# Altium PCB BOOST - 副本.PcbDoc
Units mm, origin at the board's own origin, x right, y up, seen from the top; angles counter-clockwise.
Board outline 27 x 35.5 mm, 2 copper layers (Top Layer, Bottom Layer); 22 components, 9 nets, 62 pads, 16 vias.
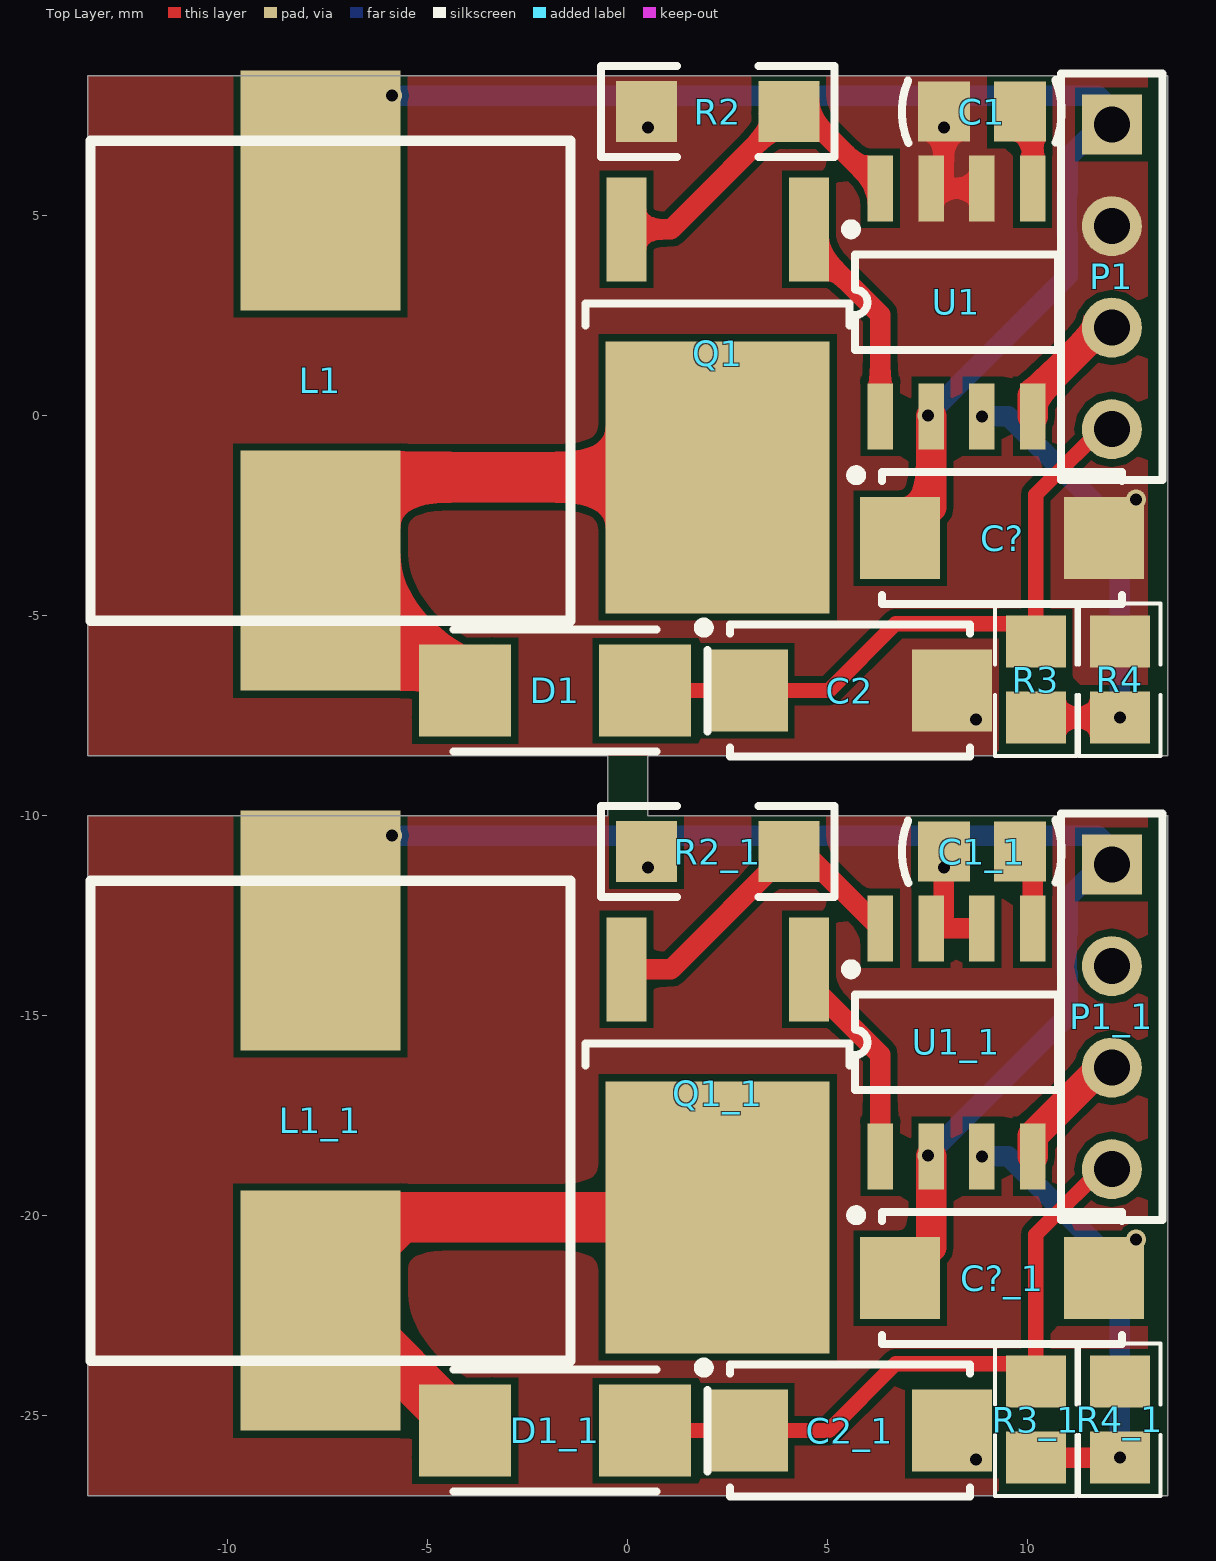
[diagram p0: Top Layer view]
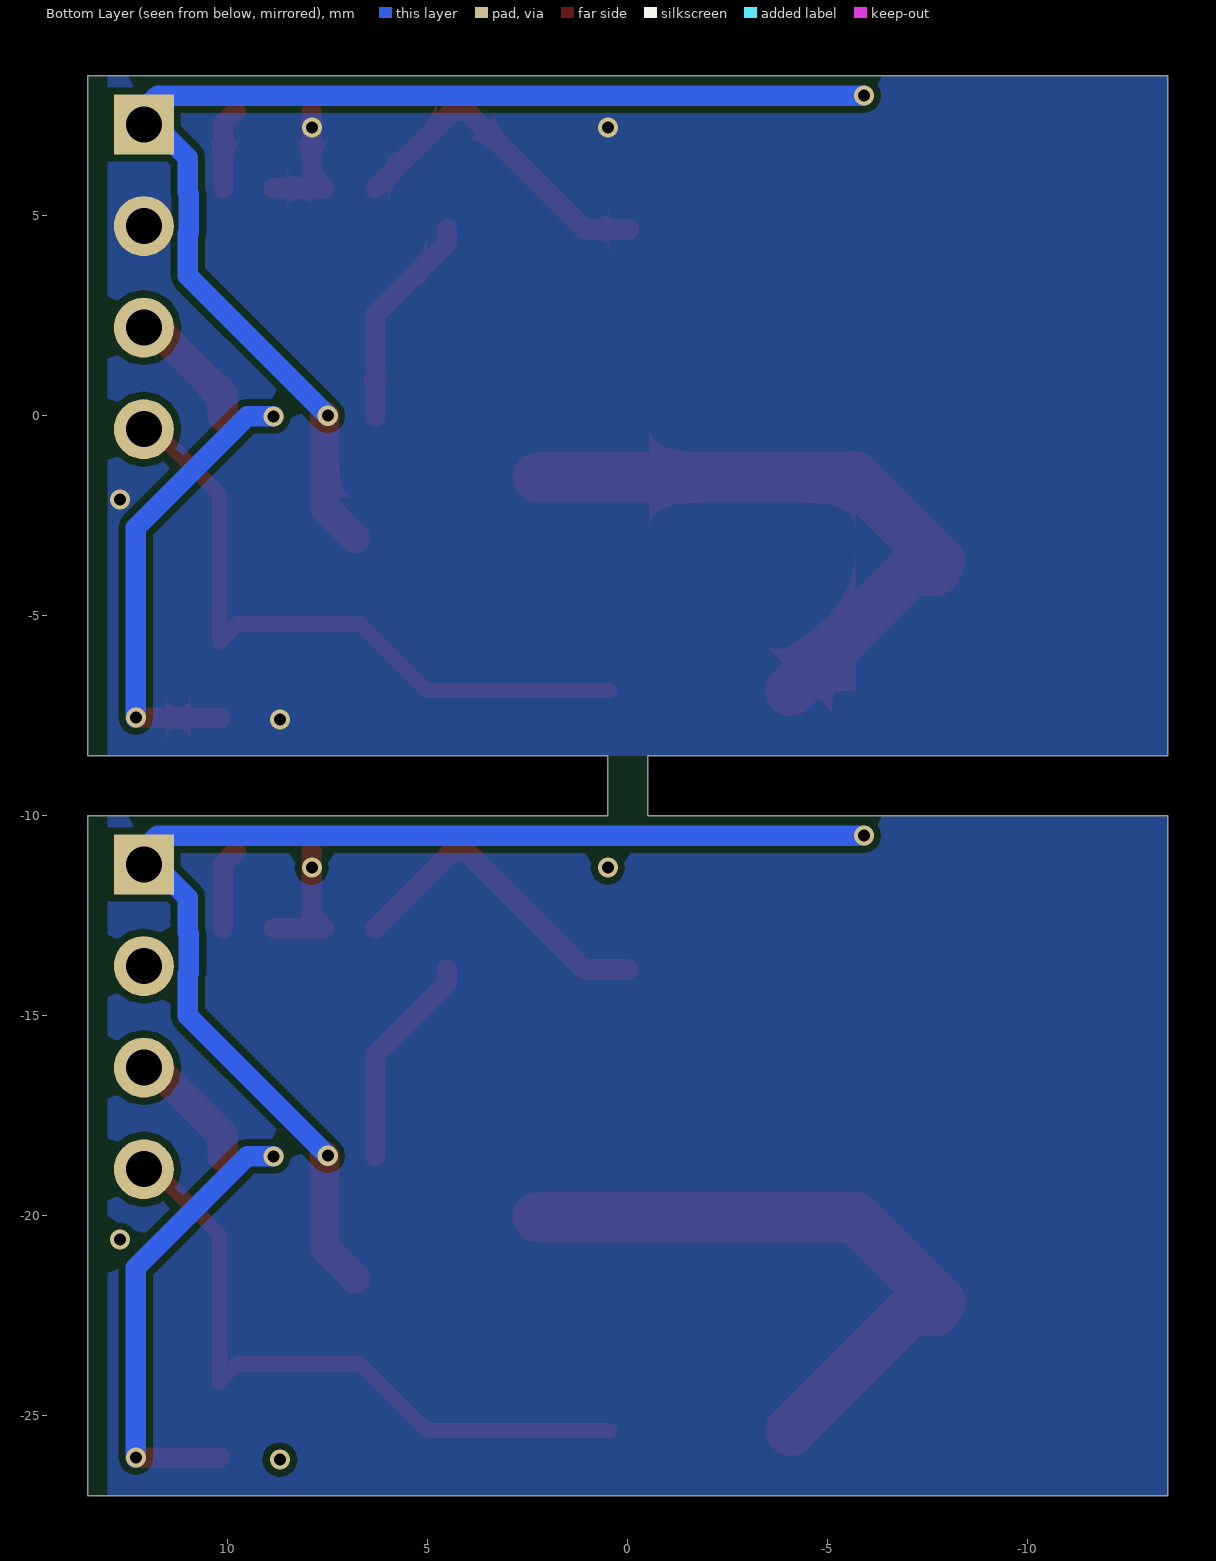
[diagram p1: Bottom Layer view, seen from below]

## Layer stack, top to bottom
Top Solder: solder mask 0.0102, Solder Resist, Dk 3.5
Top Layer: signal copper 0.0356
Dielectric 1: dielectric 0.32, FR-4, Dk 4.8
Bottom Layer: signal copper 0.0356
Bottom Solder: solder mask 0.0102, Solder Resist, Dk 3.5

## Board outline
-13.5,-27 -13.5,-10 -0.5,-10 -0.5,-8.5 -13.5,-8.5 -13.5,8.5 13.5,8.5 13.5,-8.5 0.5,-8.5 0.5,-10 13.5,-10 13.5,-27

## Design rules (kind name [scope] priority, off if disabled: settings)
Clearance [All] p1: gap=0.178 ignorepadtopadclearanceinfootprint=FALSE except(0: Arc-Hole Track-Hole SMDPad-Hole THPad-Hole Via-Hole Fill-Hole Poly-Hole Region-Hole Text-Hole)
MinimumSolderMaskSliver [All] p1: minsoldermaskwidth=0.178
PolygonConnect [All] p1: connectstyle=Direct reliefconductorwidth=3 reliefentries=4 polygonreliefangle="90 Angle" airgapwidth=3
RoutingCorners [All] p1: cornerstyle=Round minsetback=2.54 maxsetback=2.54
RoutingVias [All] p1: holewidth=0.711 width=1.27 viastyle="Through Hole" minholewidth=0.711 minwidth=1.27 maxholewidth=0.711 maxwidth=1.27
SilkToSilkClearance [All] p1 off: silktosilkclearance=0.254
SilkToSolderMaskClearance [IsPad] p1 off: minsilkscreentomaskgap=0.254 clearancetoexposedcopper=TRUE
SolderMaskExpansion [All] p1: expansion=0.102
Width [All] p1: maxlimit=2.54 minlimit=0.254 preferedwidth=0.254
26 further rules are at their usual default settings.

## Classes and differential pairs
component class 原理图: C1 C2 C? D1 L1 P1 Q1 R2 R3 R4 U1

## Components (designator, comment, footprint, x,y, rotation, side; value= is the part's Value field where it differs from the comment)
C1 "100nf/50V/0603" C-RAD-0805 8.852,7.604 r180 top
C1_1 "100nf/50V/0603" C-RAD-0805 8.852,-10.896 r180 top (schematic designator C1)
C2 "10uF/10*10/400V" 5032 5.55,-6.874 r0 top
C2_1 "10uF/10*10/400V" 5032 5.55,-25.374 r0 top (schematic designator C2)
C? "10uF/10*10/400V" 5032 9.36,-3.064 r0 top
C?_1 "10uF/10*10/400V" 5032 9.36,-21.564 r0 top (schematic designator C?)
D1 "D-Schottky" DIODE-SMA -1.816,-6.874 r0 top
D1_1 "D-Schottky" DIODE-SMA -1.816,-25.374 r0 top (schematic designator D1)
L1 "10*10/150uH" l1212 -1.433,6.873 r270 top
L1_1 "10*10/150uH" l1212 -1.433,-11.627 r270 top (schematic designator L1)
P1 "Header 4" HDR1X4_BLUE 12.1,7.28 r270 top
P1_1 "Header 4" HDR1X4_BLUE 12.1,-11.22 r270 top (schematic designator P1)
Q1 "MOSFET-N" D-PAK 2.248,0.51 r270 top
Q1_1 "MOSFET-N" D-PAK 2.248,-17.99 r270 top (schematic designator Q1)
R2 "Res1" 1206 2.248,7.604 r0 top value=100K/0603/1%
R2_1 "Res1" 1206 2.248,-10.896 r0 top value=100K/0603/1% (schematic designator R2)
R3 "Res1" 0805-1 10.2,-6.6 r270 top value=100K/0603/1%
R3_1 "Res1" 0805-1 10.2,-25.1 r270 top value=100K/0603/1% (schematic designator R3)
R4 "Res1" 0805-1 12.3,-6.6 r90 top value=100K/0603/1%
R4_1 "Res1" 0805-1 12.3,-25.1 r90 top value=100K/0603/1% (schematic designator R4)
U1 "MAX1771" sop-8 6.312,-0.016 r90 top
U1_1 "MAX1771" sop-8 6.312,-18.516 r90 top (schematic designator U1)

## Footprints (in the part's own frame and the unit in brackets; to place one, negate y for a bottom-side part, rotate by r counter-clockwise, add the part's x,y. Pads: shape width x height; smd on the part's side, far side on the other; paste and mask are expansions set on the pad)
0805-1 [mm] "贴片带丝印"
  rect 1.3x1.5 smd: 1(-0.95,0) 2(0.95,0)
  silkscreen extent -1.91,-1.02 1.91,1.02, body extent -1.14,-0.51 1.14,0.51, height 1
1206 [mil] "贴片元件"
  rect 60x60 smd: 1(-70,0) 2(70,0)
  silkscreen extent -115,-45 115,45, body extent -75,-35 75,35, height 39
5032 [mm] "XTAL_8M 2-Leads, Body 6.00x3.20mm, IPC Medium Density"
  rect 2x2.05 smd: 1(-2.55,0) 2(2.55,0)
  silkscreen extent -3.77,-1.65 3,1.7, body extent -3,-1.6 3,1.6, height 1.2
C-RAD-0805 [mm] "贴片电容"
  rect 1.3x1.5 smd: 1(-0.95,0) 2(0.95,0)
  silkscreen extent -2,-0.79 2,0.79, body extent -1.27,-0.64 1.27,0.64, height 0.9
D-PAK [mm] "D-PAK, 3-Pads, Body 6.20x6.66mm (max), IPC Medium Density"
  rect 2.6x1 smd: 1(-4.15,2.28) 3(-4.15,-2.28)
  rect 6.8x5.6 smd: 2(2.05,0)
  silkscreen extent -4.27,-3.3 -1.75,3.46, body extent -4.6,-3.3 4.65,3.3, height 2.31
DIODE-SMA [mm] "贴片二极管"
  rect 2.3x2.3 smd: 1(-2.25,0) 2(2.25,0)
  silkscreen extent -2.54,-1.52 3.81,1.52, body extent -2.92,-1.4 2.92,1.4, height 3
HDR1X4_BLUE [mm]
  rect 1.5x1.5 hole 0.9: 1(0,0)
  round 1.5 hole 0.9: 2(2.54,0) 3(5.08,0) 4(7.62,0)
  silkscreen extent -1.27,-1.27 8.89,1.27, body extent -1.27,-1.27 8.89,1.27, height 2
l1212 [mm]
  rect 6x4 smd: 1(1.25,-6.25) 2(10.75,-6.25)
  silkscreen extent 0,-12 12,0
sop-8 [mil]
  rect 65x25 smd: 1(0,0) 2(0,-50) 3(0,-100) 4(0,-150) 5(224.41,-150) 6(224.41,-100) 7(224.41,-50) 8(224.41,0)
  silkscreen extent 65,-175 159,25, body extent -9,-174 229,24, height 63

## Part data
C1 C1_1: library part C_1
C2 C2_1 C? C?_1: library part CAP
D1 D1_1: "肖特基二极管", Code_JEDEC=DO-214-AA, LatestRevisionDate=17-Jul-2002, LatestRevisionNote="Re-released for DXP Platform.", PackageReference=SMB, Published=8-Jun-2000, Publisher="Altium Limited", Type=SS14
L1 L1_1: library part L
P1 P1_1: "Header, 4-Pin", LatestRevisionDate=17-Jul-2002, LatestRevisionNote="Re-released for DXP Platform.", Publisher="Altium Limited"
Q1 Q1_1: "N-Channel MOSFET", PackageDocument=1995/1996, LatestRevisionDate=17-Jul-2002, LatestRevisionNote="Re-released for DXP Platform.", PackageReference=E3, Published=8-Jun-2000, Publisher="Altium Limited"
R2 R2_1 R3 R3_1 R4 R4_1: "贴片电阻", LatestRevisionDate=17-Jul-2002, LatestRevisionNote="Re-released for DXP Platform.", PackageReference=AXIAL-0.4, Published=8-Jun-2000, Publisher="Altium Limited"

## Via types
v1: diameter 0.5, hole 0.3, Top Layer to Bottom Layer, tented both sides, 14 vias
v2: diameter 0.508, hole 0.3, Top Layer to Bottom Layer, tented both sides, 2 vias

## Nets (pads, with @x,y where several pads share a name; then routed paths per layer and width w, separated by ;. In a path a pad name is that pad's centre, name@x,y a point inside that pad or via, vN(x,y) a via of type N, cw(c..) or ccw(c..) an arc to the next point about the centre after c; other vN are vias at no path point)
12V: C?.1 L1.1 P1.1 U1.2 | length 31.1
  Top Layer w0.762: C?.1 7.582,-2.292 U1.2
  Bottom Layer w0.508: v1(-5.9,8) 11.758,8 12.154,7.604 11,6.45 11,5.581 10.972,5.553 10.972,4.574 11,4.546 11,3.5 v2(7.5,0)
EN: P1.3 U1.4 | length 3.4
  Top Layer w0.762: U1.4 10.122,0.492 P1.3@12.154,2.524
GND: C1.2 C2.2 C?.2 P1.2 R2.1 R4.2 U1.6 U1.7 | length 3.3
  Top Layer w0.508: C1.2 7.902,6.004 U1.7 U1.6
  other v1: 8.7,-7.6 12.7,-2.1 0.5,7.2 7.9,7.2
HV: C2.1 D1.2 P1.4 R3.1 | length 17.1
  Top Layer w0.381: D1.2 C2.1 5.026,-6.874 6.7,-5.2 9.75,-5.2 R3.1 10.2,-1.97 P1.4@12.154,-0.016
NetC1_1: C1.1 U1.5 | length 2.1
  Top Layer w0.508: C1.1 10.122,7.284 U1.5
NetD1_1: D1.1 L1.2 Q1.2 | length 15.8
  Top Layer w1.27: L1.2@-7.812,-3.654 -5.698,-1.54 Q1.2 ; L1.2 -7.063,-3.877 D1.1
NetQ1_G: Q1.1 U1.1 | length 5.4
  Top Layer w0.508: Q1.1 4.528,4.308 6.312,2.524 U1.1
NetQ1_S: Q1.3 R2.2 U1.8 | length 8.4
  Top Layer w0.508: Q1.3 1.082,4.66 R2.2 4.392,7.604 U1.8
NetR3_2: R3.2 R4.1 U1.3 | length 11.5
  Top Layer w0.508: R3.2 v1(12.3,-7.55)
  Bottom Layer w0.508: v1(8.852,-0.016) 9.516,-0.016 12.3,-2.8 v1(12.3,-7.55)
pads on no net: C1_1.1 C1_1.2 C2_1.1 C2_1.2 C?_1.1 C?_1.2 D1_1.1 D1_1.2 L1_1.1 L1_1.2 P1_1.1 P1_1.2 P1_1.3 P1_1.4 Q1_1.1 Q1_1.2 Q1_1.3 R2_1.1 R2_1.2 R3_1.1 R3_1.2 R4_1.1 R4_1.2 U1_1.1 U1_1.2 U1_1.3 U1_1.4 U1_1.5 U1_1.6 U1_1.7 U1_1.8
copper on no net: | length 98
  Top Layer w0.381: 0.434,-25.374 3,-25.374 5.026,-25.374 6.7,-23.7 9.75,-23.7 10.2,-24.15 10.2,-20.47 12.154,-18.516
  Top Layer w0.508: -0.032,-13.84 1.082,-13.84 4.026,-10.896 4.392,-10.896 6.312,-12.816 ; 4.528,-13.84 4.528,-14.192 6.312,-15.976 6.312,-18.516 ; 7.902,-10.896 7.902,-12.496 7.582,-12.816 8.852,-12.816 ; 9.802,-10.896 10.122,-11.216 10.122,-12.816 ; 10.2,-26.05 v1(12.3,-26.05)
  Top Layer w0.762: 6.81,-21.564 7.582,-20.792 v2@7.582,-18.516 ; 10.122,-18.516 10.122,-18.008 12.154,-15.976
  Top Layer w1.27: -7.812,-22.154 -5.698,-20.04 2.248,-20.04 ; -7.683,-22.377 -7.063,-22.377 -4.066,-25.374
  Bottom Layer w0.508: v1(-5.9,-10.5) 11.758,-10.5 12.154,-10.896 11,-12.05 11,-12.919 10.972,-12.947 10.972,-13.926 11,-13.954 11,-15 v2(7.5,-18.5) ; v1(8.852,-18.516) 9.516,-18.516 12.3,-21.3 v1(12.3,-26.05)
  other v1: 8.7,-26.1 12.7,-20.6 0.5,-11.3 7.9,-11.3

## Polygon pours and split planes (outlines as drawn)
no net on Bottom Layer "NONET_L02_P044" (solid, pour order 44): -13.5,-27 13,-27 13,-10 -13.5,-10
GND on Bottom Layer "GND_L02_P010" (solid, pour order 10): -13.5,-8.5 13,-8.5 13,8.5 -13.5,8.5
GND on Bottom Layer "GND_L02_P008" (solid, pour order 8): -14,8.5
no net on Top Layer "NONET_L01_P046" (solid, pour order 46): -13.5,-27 -13.5,-10 13,-10 13,-27
GND on Top Layer "GND_L01_P012" (solid, pour order 12): -13.5,-8.5 -13.5,8.5 13,8.5 13,-8.5

## Silkscreen, mask and mechanical layers (free items; w line width, h text height)
Top Paste:
  rectangle: -4,-11.5 -1.5,-10
  rectangle: -4,7 -1.5,8.5
Bottom Solder:
  drawing of 12299 lines, arcs and shapes, not listed
  text "Zhihu ID : Sadudu" at -13,8 h2.03 r180
  text "Vi" at 9.5,8 h1.78 r180
  text "Zhihu ID : Sadudu" at -11,7 h0
  text "Love science, love making..." at -13,6 h2.03 r180
  text "G" at 9.5,5.5 h1.78 r180
  text "Nixie clock step-up module." at -13,4.5 h2.03 r180
  text "EN" at 9.1,3 h1.78 r180
  text "12V --> 180V" at -0.5,2 h2.03 r180
  text "Vo" at 9.1,0.5 h1.78 r180
  text "Zhihu ID : Sadudu" at -13,-10.5 h2.03 r180
  text "Vi" at 9.5,-10.5 h1.78 r180
  text "Zhihu ID : Sadudu" at -11,-11.5 h0
  text "Love science, love making..." at -13,-12.5 h2.03 r180
  text "G" at 9.5,-13 h1.78 r180
  text "Nixie clock step-up module." at -13,-14 h2.03 r180
  text "EN" at 9.1,-15.5 h1.78 r180
  text "12V --> 180V" at -0.5,-16.5 h2.03 r180
  text "Vo" at 9.1,-18 h1.78 r180

## Dimensions
17.5,8.5 to 17,-27 on Top Overlay
-13.5,-29 to 13.5,-29 on Top Overlay